# Altium PCB MainBoard.PcbDoc
Units mil, origin at the board's own origin, x right, y up, seen from the top; angles counter-clockwise.
Board outline 1692.91 x 1496.06 mil, 2 copper layers (Top Layer, Bottom Layer), stack 62.8 mil thick; 46 components, 34 nets, 177 pads, 0 vias.
Unrouted connection lines stored in the file: 105.
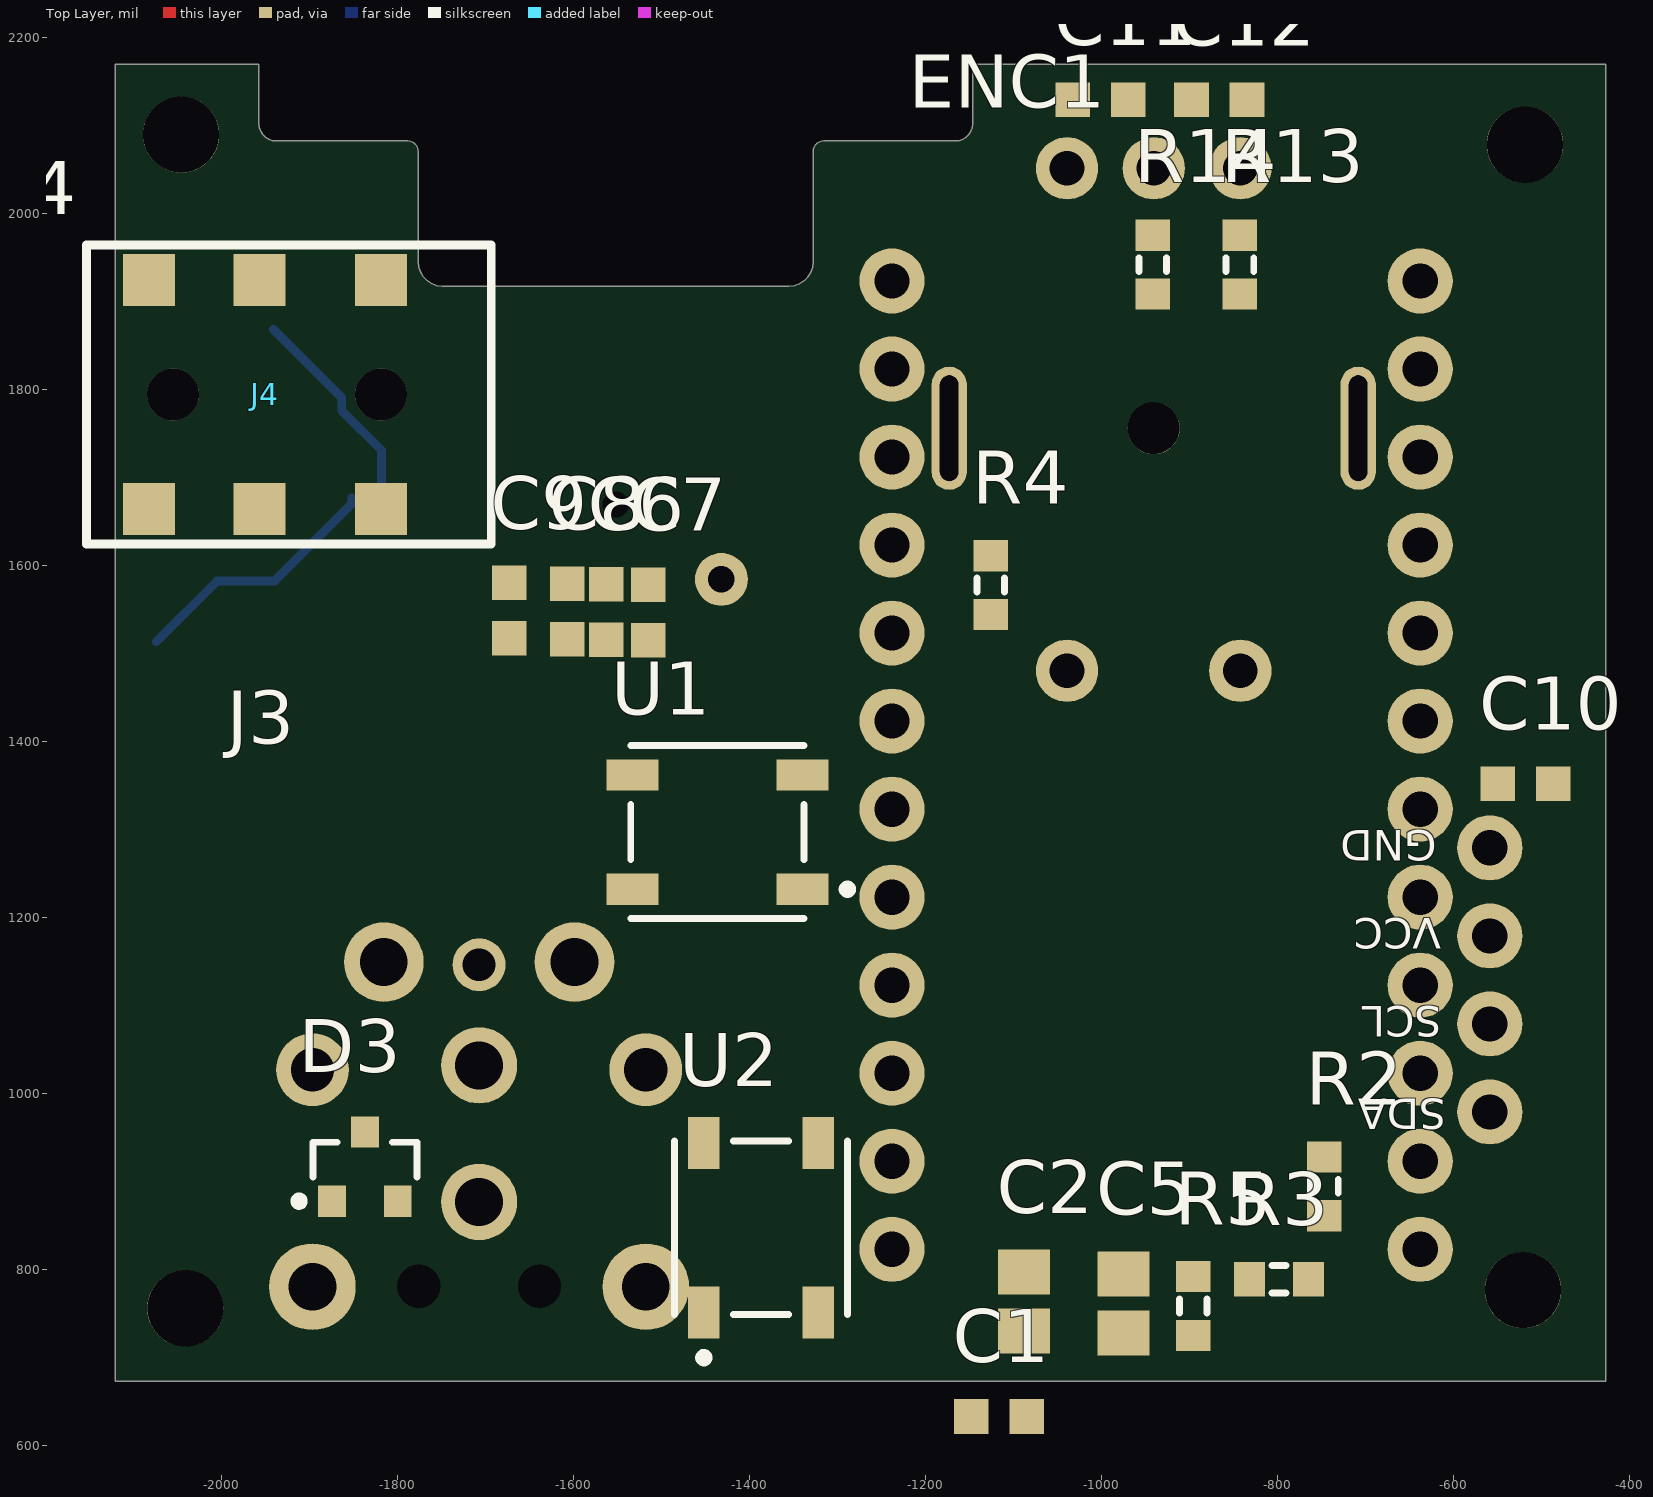
[diagram p0: Top Layer view]
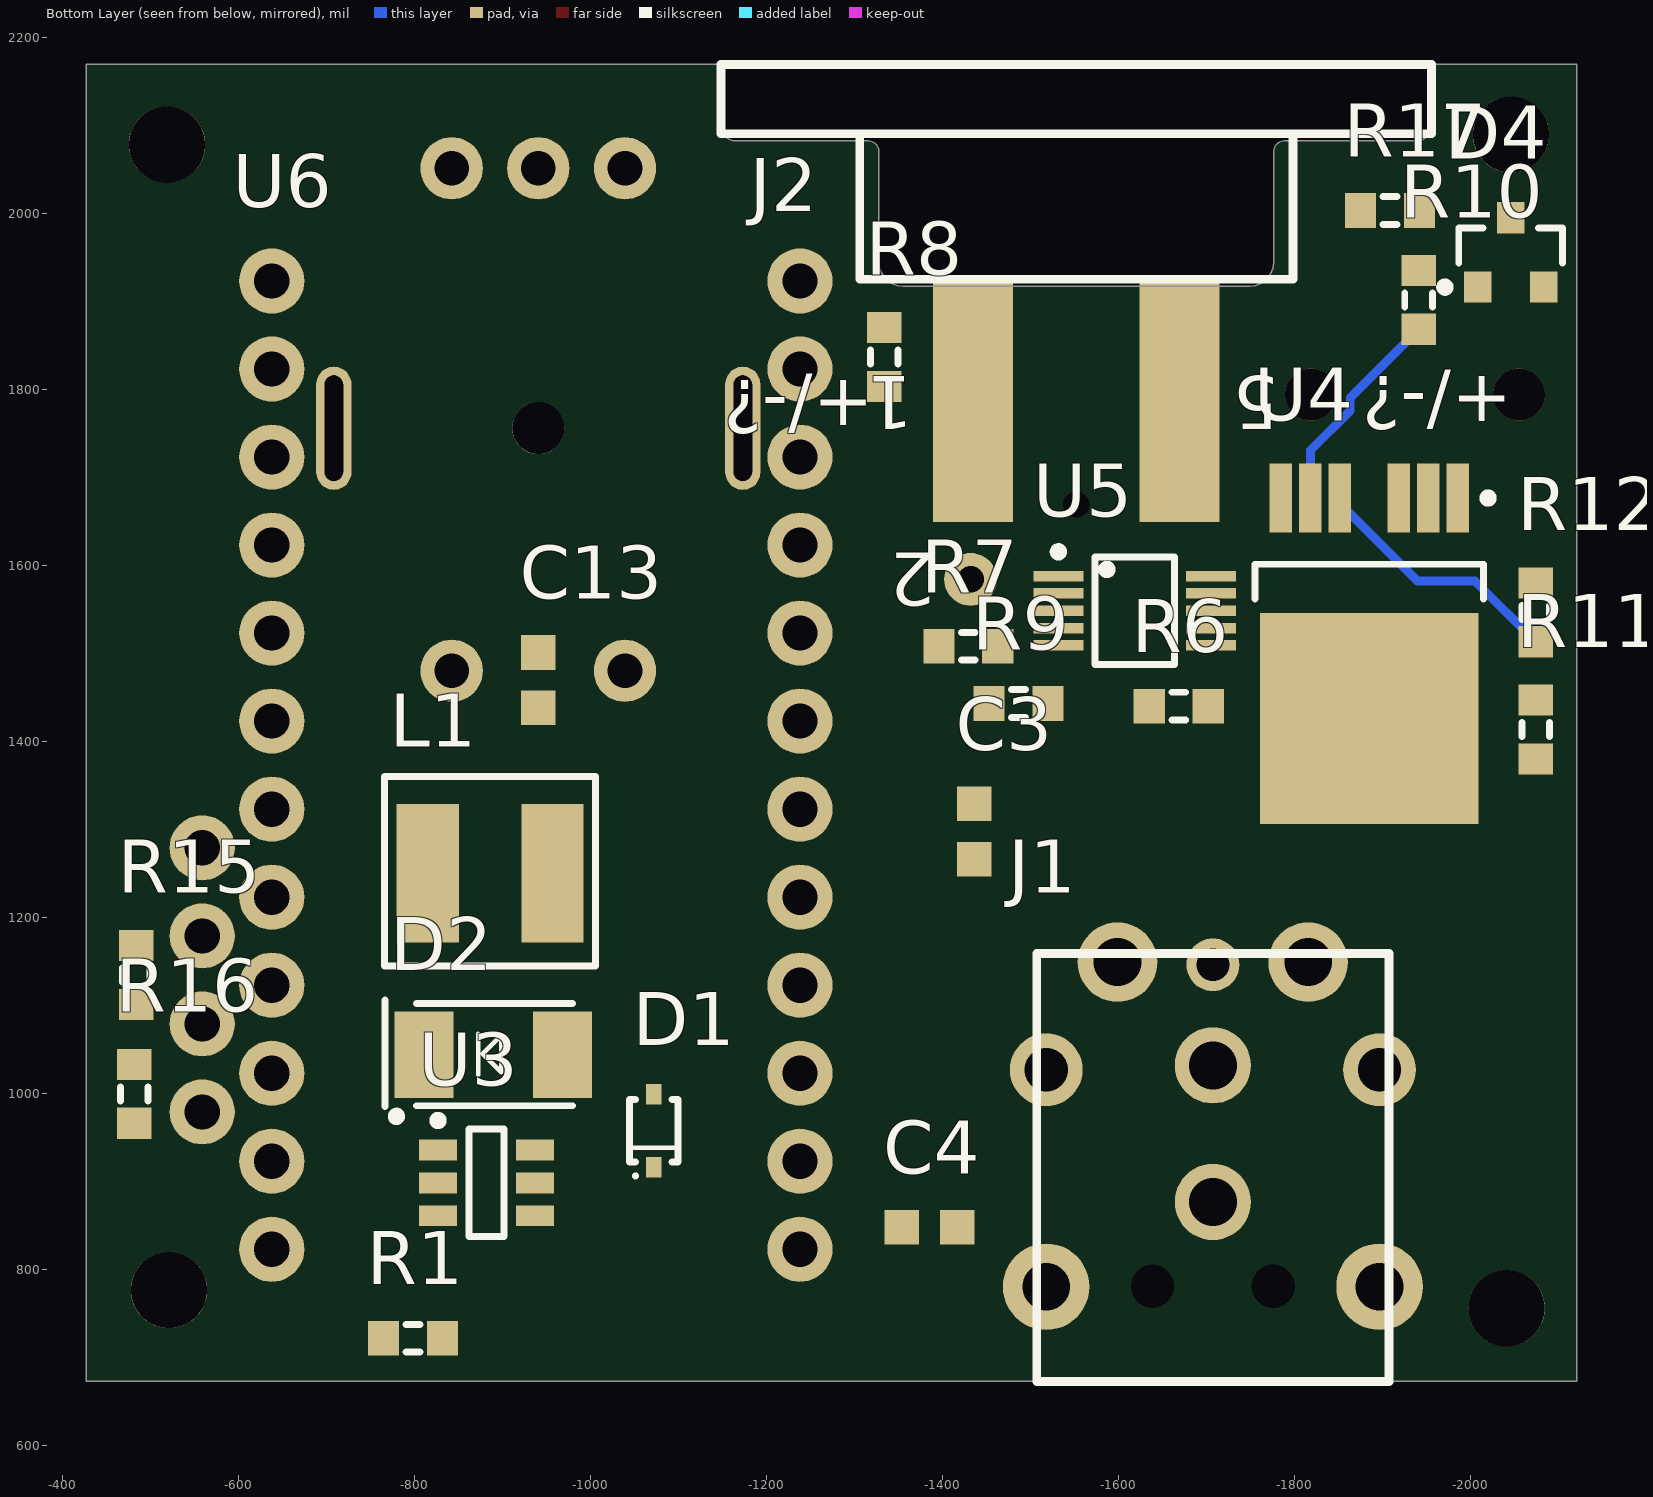
[diagram p1: Bottom Layer view, seen from below]

## Layer stack, top to bottom
Top Solder: solder mask 1, Solder Resist, Dk 3.5
Top Layer: signal copper 1.4
Dielectric 1: dielectric 60, FR-4, Dk 4.8
Bottom Layer: signal copper 1.4
Bottom Solder: solder mask 1, Solder Resist, Dk 3.5

## Board outline
-1957.39,2101.71 -1957.39,2169.03 -2120.46,2169.03 -2120.46,672.97 -427.54,672.97 -427.54,2169.03 -1146.76,2169.03 -1146.76,2101.43 -1147.24,2097.11 -1148.68,2093.01 -1150.99,2089.33 -1154.06,2086.26 -1157.74,2083.94 -1161.84,2082.51 -1166.16,2082.02 -1315.94,2082.02 -1318.56,2081.73 -1321.06,2080.85 -1323.3,2079.45 -1325.17,2077.58 -1326.58,2075.34 -1327.45,2072.84 -1327.75,2070.21 -1327.75,1944.62 -1328.44,1938.49 -1330.48,1932.66 -1333.76,1927.44 -1338.12,1923.07 -1343.35,1919.79 -1349.17,1917.75 -1355.3,1917.06 -1748.84,1917.06 -1754.97,1917.75 -1760.8,1919.79 -1766.02,1923.07 -1770.39,1927.44 -1773.67,1932.66 -1775.71,1938.49 -1776.4,1944.62 -1776.4,2070.21 -1776.69,2072.84 -1777.57,2075.34 -1778.98,2077.58 -1780.85,2079.45 -1783.08,2080.85 -1785.58,2081.73 -1788.21,2082.02 -1937.7,2082.02 -1942.08,2082.52 -1946.24,2083.97 -1949.98,2086.32 -1953.09,2089.43 -1955.44,2093.17 -1956.89,2097.33

## Design rules (kind name [scope] priority, off if disabled: settings)
Clearance [All] p1: gap=10 ignorepadtopadclearanceinfootprint=FALSE except(0: Arc-Hole Track-Hole SMDPad-Hole THPad-Hole Via-Hole Fill-Hole Poly-Hole Region-Hole Text-Hole)
PolygonConnect [All] p1: connectstyle=Relief reliefconductorwidth=10 reliefentries=4 polygonreliefangle="90 Angle" airgapwidth=10
RoomDefinition TopLevel [InComponentClass('TopLevel')] p1: confinementstyle=ConfineIn formatcopy=TRUE lockcomponents=FALSE outline -7061,-4600 -5061,-4600 -5061,-3600 -7061,-3600
RoomDefinition Controller [InComponentClass('Controller')] p2: confinementstyle=ConfineIn formatcopy=TRUE lockcomponents=FALSE outline -5515,-2995 1215,-2995 1215,-1375 -5515,-1375
RoutingVias [All] p1: holewidth=28 width=50 viastyle="Through Hole" minholewidth=28 minwidth=50 maxholewidth=28 maxwidth=50
SolderMaskExpansion [All] p1: expansion=4
Width [All] p1: maxlimit=10 minlimit=10 preferedwidth=10
30 further rules are at their usual default settings.

## Classes and differential pairs
component class TopLevel: FID1 FID2 FID3 LB1 LB2 MP1 MP2 MP3 MP4 MP5 U$?

## Components (designator, comment, footprint, x,y, rotation, side; value= is the part's Value field where it differs from the comment)
C1 "100nF" CAPC1608N -1116.5,633 r0 top
C2 "1uF" CAPC2012N -1088,763.46 r270 top
C3 "0.1uF 50V" CAPC1608N -1436,1297.5 r90 bottom
C4 "0.1uF 50V" CAPC1608N -1385.5,848 r0 bottom
C5 "20uF 5mOhm" CAPC2012N -975,761.54 r270 top
C6 "0.1uF 50V" CAPC1608N -1563,1547 r90 top
C7 "1uF 50V" CAPC1608N -1515,1546.5 r90 top
C8 "100pF 50V" CAPC1608N -1607,1547.5 r90 top
C9 "0.1uF 50V" CAPC1608N -1673,1548.5 r90 top
C10 "10nF 25V" CAPC1608N -518.5,1352 r0 top
C11 "10nF 25V" CAPC1608N -1001.5,2129 r0 top
C12 "10nF 25V" CAPC1608N -866.5,2129 r180 top
C13 "10nF 25V" CAPC1608N -940.93,1469.5 r90 bottom
D1 "1N4448WS-7-F" 1N4448WS-7-F -1072,957.46 r90 bottom
D2 "B140-13-F" "DO-214AC SMA" -889.74,1044 r0 bottom
D3 "BAT54S" BAT54SLT1G -1837,917 r90 top
D4 "BAT54S" BAT54SLT1G -2045.6,1955.37 r90 bottom
ENC1 "PEC11R-4215K-S0012" PEC11R-4215K-S0012 -940.93,1755.71 r180 top
J1 "DELL_BARREL_JACK_A831m" DELL_POWER_JACK_A831m -1707.26,672.77 r180 bottom locked
J2 "RPC1-12RB-6P(71)" HIROSE-RPC1 -1552.07,2169.03 r0 bottom locked
J3 "OLED 128x32 I2C" "OLED 128x32 I2C" -559.11,1279 r180 top locked
J4 "PJ-313D" PJ-313D -2153.4,1794.02 r0 top
L1 "22uH" SRN5040-220M -886.13,1250 r180 bottom
R1 "?" RESC1608N -798.54,722 r180 bottom
R2 "107k" RESC1608N -747,894.46 r90 top
R3 "?" RESC1608N -798.54,789 r0 top
R4 "4.7k" RESC1608N -1126,1577.46 r90 top
R5 "18.2k" RESC1608N -896,758.46 r90 top
R6 "5M" RESC1608N -1668.54,1440 r180 bottom
R7 "500R" RESC1608N -1429.46,1508 r180 bottom
R8 "10k" RESC1608N -1334,1836.54 r90 bottom
R9 "0R" RESC1608N -1486.54,1443 r180 bottom
R10 "10k" RESC1608N -1941,1901.54 r90 bottom
R11 "10k" RESC1608N -2074,1413.54 r270 bottom
R12 "10k" RESC1608N -2074,1546.54 r270 bottom
R13 "10k" RESC1608N -843,1941.54 r270 top
R14 "10k" RESC1608N -942,1941.54 r270 top
R15 "10k" RESC1608N -484,1134.54 r90 bottom
R16 "10k" RESC1608N -482,999.54 r270 bottom
R17 "500R" RESC1608N -1908.54,2003 r0 bottom
U1 "ADAI-WS2812B-4" ADAI-WS2812B_V -1436.54,1296.96 r180 top
U2 "ADAI-WS2812B-4" ADAI-WS2812B_V -1387.04,847.46 r90 top
U3 "MCP16301" MCP16301 -882.12,898.4 r180 bottom
U4 "VN5E010AH" VN5E010AH -1885,1510.65 r270 bottom
U5 "TI-ADS1X18XXX10" ADS1118 -1618.39,1548.37 r180 bottom
U6 "Arduino Pro Micro" "Arduinno Pro Micro" -1238.17,1922.97 r0 bottom locked

## Footprints (in the part's own frame and the unit in brackets; to place one, negate y for a bottom-side part, rotate by r counter-clockwise, add the part's x,y. Pads: shape width x height; smd on the part's side, far side on the other; paste and mask are expansions set on the pad)
1N4448WS-7-F [mm] "SOD323"
  rect 0.59x0.45 smd: A(1.055,0) K(-1.055,0)
  silkscreen extent -1.35,-0.7 0.9,0.7, body extent -1.25,-0.7 1.25,0.7, height 1.2
ADAI-WS2812B_V [mm] "SMD, 4-Leads, Body 5x5mm, Pitch 3.3mm"
  rect 1.5x0.9 smd: 1(-2.45,1.65) 2(-2.45,-1.65) 3(2.45,-1.65) 4(2.45,1.65)
  silkscreen extent -3.88,-2.5 2.5,2.5, body extent -2.7,-2.5 2.7,2.5, height 1.69
ADS1118 [mm] "VSOP"
  rect 1.45x0.3 smd: 1(-2.2,1) 2(-2.2,0.5) 3(-2.2,0) 4(-2.2,-0.5) 5(-2.2,-1) 6(2.2,-1) 7(2.2,-0.5) 8(2.2,0) 9(2.2,0.5) 10(2.2,1)
  silkscreen extent -2.33,-1.55 1.15,1.82, body extent -2.45,-1.55 2.45,1.55, height 1.1
"Arduinno Pro Micro" [mil]
  round 74 hole 40: 1(0,1100) 2(0,1000) 3(0,900) 4(0,800) 5(0,700) 6(0,600) 7(0,500) 8(0,400) 9(0,300) 10(0,200) 11(0,100) 12(0,0) 13(600,0) 14(600,100) 15(600,200) 16(600,300) 17(600,400) 18(600,500) 19(600,600) 20(600,700) 21(600,800) 22(600,900) 23(600,1000) 24(600,1100)
  body extent -50,-50 650,1312, height 321
BAT54SLT1G [mm] "SOT23, 3-Leads, Body 2.92x2.37mm, Pitch 0.95mm, IPC Medium Density"
  rect 0.9x0.8 smd: 1(-1,0.95) 2(-1,-0.95) 3(1,0)
  silkscreen extent -1.12,-1.5 0.7,2.02, body extent -1.32,-1.52 1.32,1.52, height 1.11
CAPC1608N [mm] "Chip Capacitor, Body 1.6x0.8mm, IPC Medium Density"
  rect 1x1 smd: 1(-0.8,0) 2(0.8,0)
  body extent -0.87,-0.48 0.87,0.48, height 0.85
CAPC2012N [mm] "Chip Capacitor, Body 2.0x1.3mm, IPC Medium Density"
  rect 1.3x1.5 smd: 1(-0.85,0) 2(0.85,0)
  body extent -1.1,-0.72 1.1,0.72, height 1.1
DELL_POWER_JACK_A831m [mm]
  round 1.524 hole 0.95: 2(0,12.025)
  round 2.5 hole 1.38: 4(-4.81,2.735) 4(4.81,2.735)
  round 2.1 hole 1.25: 4(-4.81,8.995) 4(4.81,8.995)
  round 0 hole 1.25 unplated: 10(-1.74,2.75) 10(1.74,2.75)
  round 2.2 hole 1.38: 12(0,5.18) 12(0,9.12)
  round 2.3 hole 1.38: 14(-2.75,12.1) 14(2.75,12.1)
  silkscreen extent -5.08,0 5.08,12.35, body extent -5.01,0.01 5.04,12.35, height 11.1
"DO-214AC SMA" [mm] "Diodes Inc. DO-214AC SMA Package"
  rect 1.7x2.5 smd: A(-2,0) K(2,0)
  silkscreen extent -2.29,-1.57 3.12,1.9, body extent -2.29,-1.27 2.29,1.27, height 2.4
HIROSE-RPC1 [mm]
  rect 2.3x7 smd: 1(2.98,9.7) 5(-2.98,9.7)
  round 1.524 hole 0.762: 2(3.048,14.859)
  round 0 hole 0.762: 21(0,12.7)
  silkscreen extent -10.25,0 10.25,6.2, body extent -10.09,-9.5 10.1,12.71, height 13.09
MCP16301 [mm] "IC REG BUCK ADJ 0.6A SOT23-6"
  rect 1.1x0.6 smd: 1(-1.4,0.95) 2(-1.4,0) 3(-1.4,-0.95) 4(1.4,-0.95) 5(1.4,0) 6(1.4,0.95)
  silkscreen extent -1.53,-1.55 0.5,1.92, body extent -1.7,-1.55 1.7,1.55, height 1.45
"OLED 128x32 I2C" [mil] "OLED 128x32 I2C"
  round 74 hole 40: 1(0,0) 2(0,100) 3(0,200) 4(0,300)
  body extent -63,-88 1445,388, height 202
PEC11R-4215K-S0012 [mm] "Bourns Rotary Encoder with Button- IMPORTANT! Footprint has been modified and requires the tabs are bent flat prior to insertion"
  round 1.8 hole 1: 1(-2.5,7) 2(2.5,7) A(-2.5,-7.5) B(2.5,-7.5) C(0,-7.5)
  oval 1.016x3.556 hole 0.533 slot 3.048 at 90 deg: NC(-5.9,0) NC(5.9,0)
  body extent -7.32,-7.7 7.32,7.32, height 25.16
PJ-313D [mm] "Audio Jack"
  rect 1.5x1.5 smd: 1(8.5,-3.3) 1(8.5,3.3) 2(5,-3.3) 2(5,3.3) 3(1.8,-3.3) 3(1.8,3.3)
  round 0 hole 1.5 unplated: MT(2.5,0) MT(8.5,0)
  silkscreen extent 0,-4.32 11.68,4.32, body extent -2.5,-3.75 11.5,3.75, height 5.01
RESC1608N [mm] "Chip Resistor, Body 1.6x0.8mm, IPC Medium Density"
  rect 0.9x1 smd: 1(-0.85,0) 2(0.85,0)
  silkscreen extent -0.2,-0.4 0.2,0.4, body extent -0.85,-0.48 0.85,0.48, height 0.6
SRN5040-220M [mm] "FIXED IND 22UH 1.4A 152 MOHM SMD"
  rect 1.8x4 smd: 1(-1.8,0) 2(1.8,0)
  silkscreen extent -3.05,-2.67 3.05,2.79, body extent -2.5,-2.51 2.5,2.51, height 3.41
VN5E010AH [mm] "10 mOhm high-side driver with analog current sense  for automotive applications"
  rect 1.98x0.65 smd: 1(-4.21,2.55) 2(-4.21,1.7) 3(-4.21,0.85) 5(-4.21,-0.85) 6(-4.21,-1.7) 7(-4.21,-2.55)
  rect 6.1x6.3 smd: 8(2.15,0)
  silkscreen extent -4.33,-3.3 -1.3,3.55, body extent -4.77,-3.3 4.95,3.3, height 2.43

## Part data
C1 C2 C3 C4 C5 C6 C7 C8 C9 C10 C11 C12 C13: library part "CAP NP", "Capacitor Ceramic *%"
D1: "DIODE GEN PURP 75V 250MA SOD323", Supplier Part Number 1=1N4448WS-FDICT-ND, Supplier 1=Digi-Key
D2: "DIODE SCHOTTKY 40V 1A SMA", Supplier Part Number 1=B140-FDICT-ND, Supplier 1=Digi-Key
D3 D4: "DIODE ARRAY SCHOTTKY 30V SOT23-3", Manufacturer="ON Semiconductor", Manufacturer Part Number=BAT54SLT1G, Supplier Part Number 1=BAT54SLT1GOSCT-ND, Assembly=SMT, Lead Free Status / RoHS Status="Lead free / RoHS Compliant", Part Status=Active, Supplier 1=Digi-Key
ENC1: "Bourns rotary encoder"
J2: "Hirose  CONN RECEPT 6 POS W/PINS"
L1: library part Inductor, "145mOhm", Supplier Part Number 1=SRN5040-220MCT-ND, Supplier 1=Digi-Key
R1 R2 R3 R4 R5 R6 R7 R8 R9 R10 R11 R12 R13 R14 R15 R16 R17: library part RES, "Resistor 1%"
U3: library part MCHP-MCP16301-SOT-23-6, "IC REG BUCK ADJ 0.6A SOT23-6", Supplier Part Number 1=MCP16301HT-E/CHDKR-ND, Supplier 1=Digi-Key
U4: library part VN5E010AHTR-E, "10 m? high-side driver with analog current sense  for automotive applications"

## Free pads (board coordinates)
  round 59.06 hole 59.06: 1(-2054.98,1794.02) 1(-1818.76,1794.02) 1(-940.93,1755.71)
  round 86.61 hole 86.61: 1(-2045.85,2089.25) 1(-2040.92,755.88) 1(-521.37,776.59) 1(-519.15,2077.81)
  round 43.7 hole 43.7: 1(-1775.76,781.04) 1(-1639.54,781.04)
  round 20.66 hole 20.66: 1(-1552.07,1669.03)
  round 40 hole 40: 1(-1238.17,822.97) 1(-638.17,822.97) 1(-559.11,979) 1(-559.11,1079) 1(-559.11,1179) 1(-559.11,1279)

## Nets (pads, with @x,y where several pads share a name; then routed paths per layer and width w, separated by ;. In a path a pad name is that pad's centre, name@x,y a point inside that pad or via, vN(x,y) a via of type N, cw(c..) or ccw(c..) an arc to the next point about the centre after c; other vN are vias at no path point)
5V0: C3.1 C4.1 C5.1 D1.A L1.2 R2.2 U1.1 U2.1 U6.24
AIN0: C6.1 C7.1 C8.1 R6.1 R7.2 U5.4
CRADLE_DETECT: R17.2 U6.20
CS: U5.2 U6.10
CURRENT_SENSE: C10.1 R11.2 U6.19
DEBUG_D6: U6.9
DEBUG_D8: U6.11
DEBUG_D10: U6.13
DELL_PSU: D3.3 J1.2 R4.1 U6.8
ENC_A: C12.1 ENC1.A R13.1 U6.1
ENC_B: C11.1 ENC1.B R14.1 U6.2
ENC_BUTTON: C13.1 ENC1.1 U6.17
GND: C2.2 C3.2 C4.2 C5.2 C9.2 C10.2 C11.2 C12.2 C13.2 D2.A D3.1 D4.1 ENC1.2 ENC1.C J2.1 J3.1 J4.3 R3.1 R5.1 R9.1 R10.2 R12.1 U1.3 U2.3 U3.2 U4.2 U5.3 U6.3 U6.4 U6.23
HEATER_PWM: R8.2 U6.12
MISO: U5.9 U6.15
MOSI: U5.10 U6.14
NetC1_1: C1.1 D1.K U3.1
NetC1_2: C1.2 D2.K L1.1 U3.6
NetC6_2: C6.2 C7.2 C8.2 R9.2 U5.5
NetD4_3: D4.3 J4.1 J4.2 R17.1
NetR2_1: R2.1 R5.2 U3.3
NetR8_1: R8.1 U4.3
NetR10_1: R10.1 U4.6 | length 242.6
  Bottom Layer w10: R10.1 -1863.28,1790.35 -1863.28,1775.58 -1818.07,1730.37 U4.6
NetR11_1: R11.1 R12.2 U4.5 | length 293.7
  Bottom Layer w10: R12.2 -2005.07,1582 -1939.87,1582 -1851.54,1670.34 U4.5
NetU1_2: U1.2 U2.4
SCL: J3.3 R15.1 U6.6
SCLK: U5.1 U6.16
SDA: J3.4 R16.1 U6.5
TIP_HEATER: J2.5 U4.1 U4.7
TIP_THERMOCOUPLE: J2.2 R7.1
VCC: C9.1 D3.2 D4.2 J3.2 R4.2 R6.2 R13.2 R14.2 R15.2 R16.2 U5.8 U6.21
VIN: C2.1 R1.2 U3.4 U3.5
VIN_SENSE: R1.1 R3.2 U6.7
WS2812_DATA: U1.4 U6.18
pads on no net: ENC1.NC J1.4 J1.10 J1.12 J1.14 J2.21 J4.MT U2.2 U4.8 U5.6 U5.7 U6.22

## Text inside footprints (layer, text, board x,y; h text height)
J2: Bottom Overlay "1" at -1367.07,1814.94 h60 r180; Bottom Overlay "5" at -1782.07,1814.94 h60 r180; Bottom Overlay "+/-?" at -1322.07,1809.94 h60 r180; Bottom Overlay "+/-?" at -2047.07,1814.94 h60 r180; Bottom Overlay "2" at -1392.07,1614.03 h60 r180
J3: Top Overlay "GND" at -619.11,1299 h35 r180; Top Overlay "VCC" at -614.11,1199 h35 r180; Top Overlay "SCL" at -614.11,1099 h35 r180; Top Overlay "SDA" at -609.11,994 h35 r180